# EAGLE board nakresy2 (EAGLE 7.2.0)
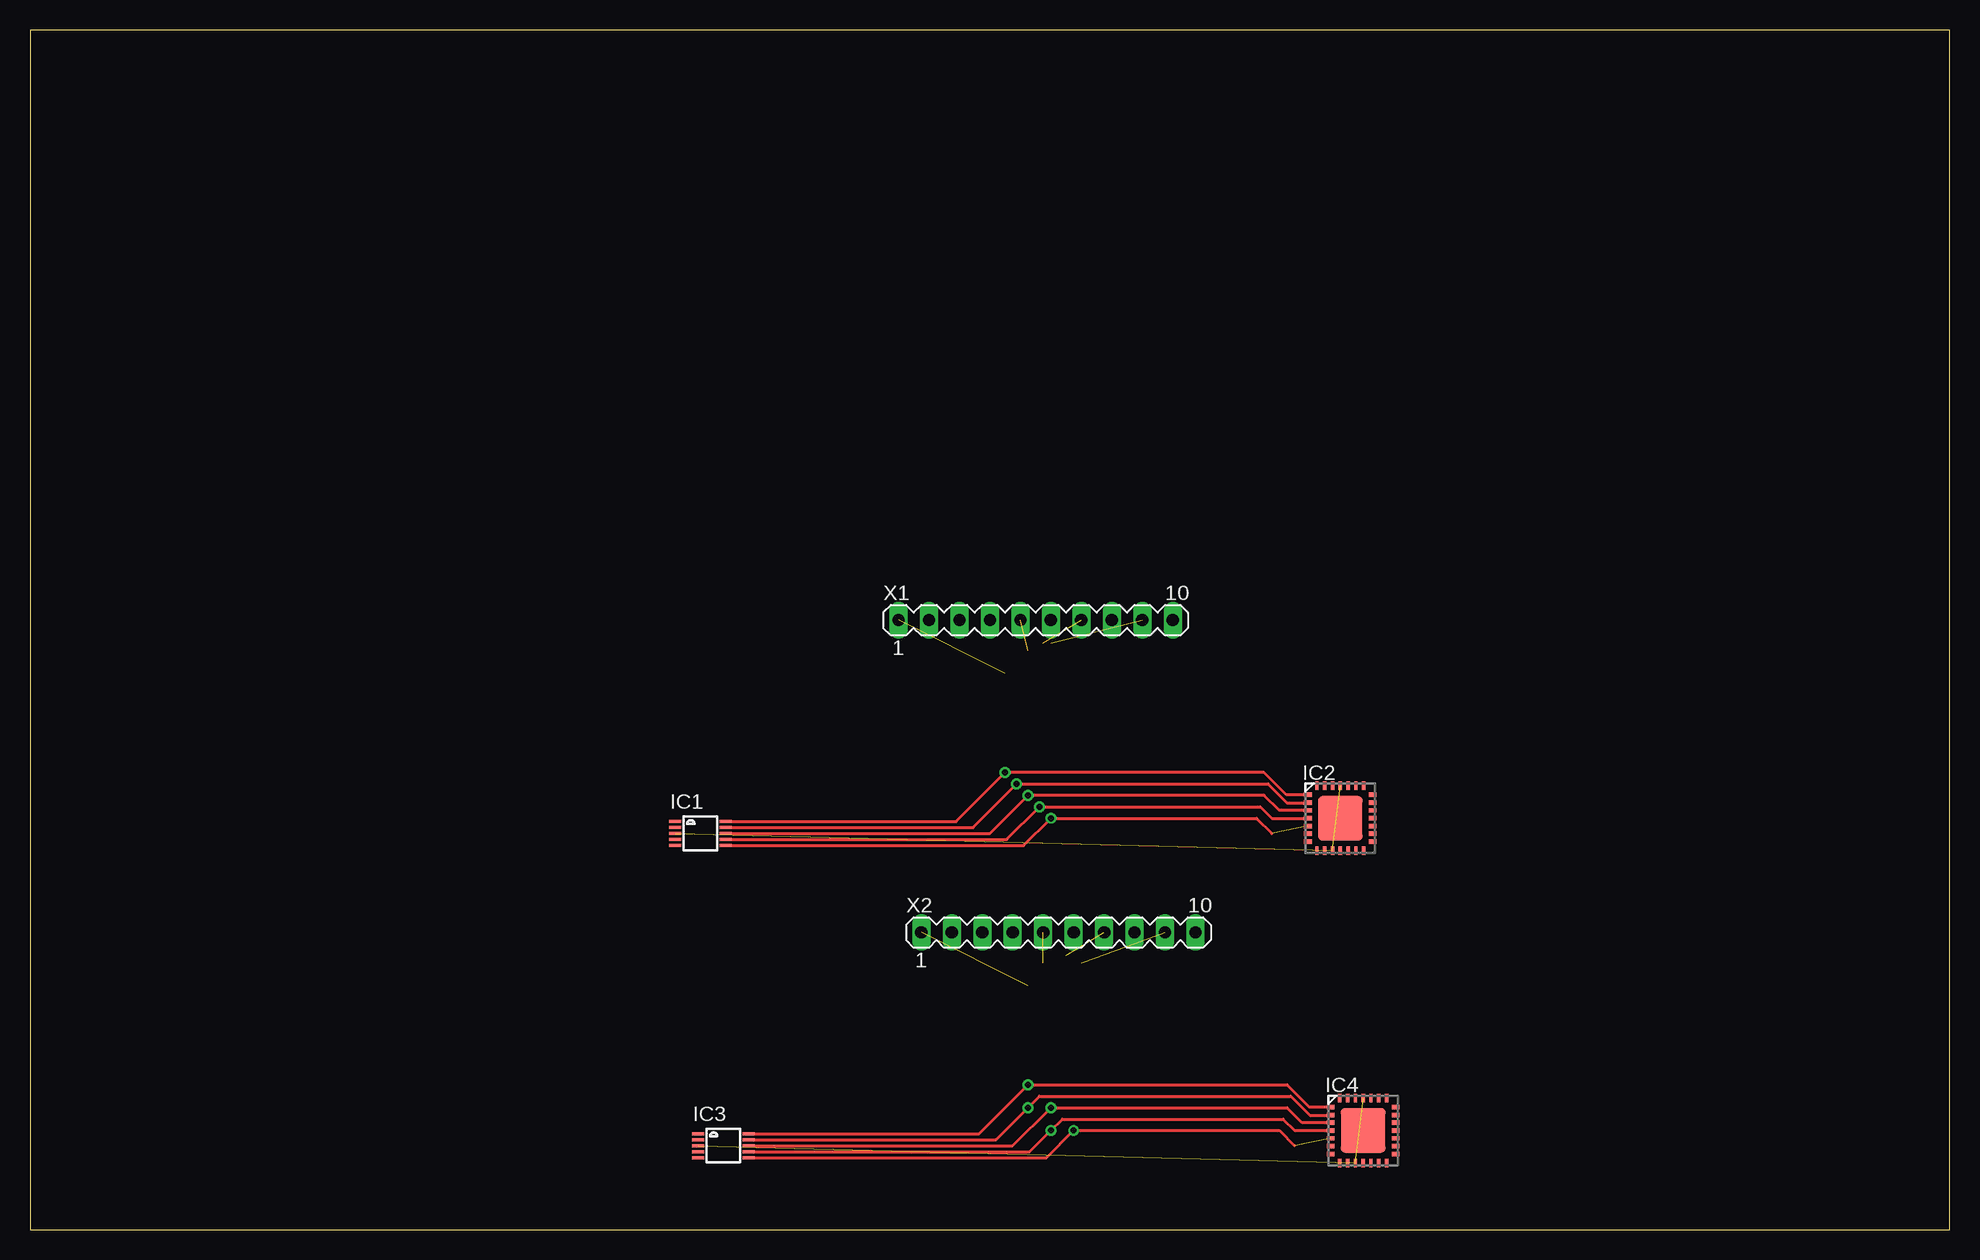
[diagram p0: board, top side]
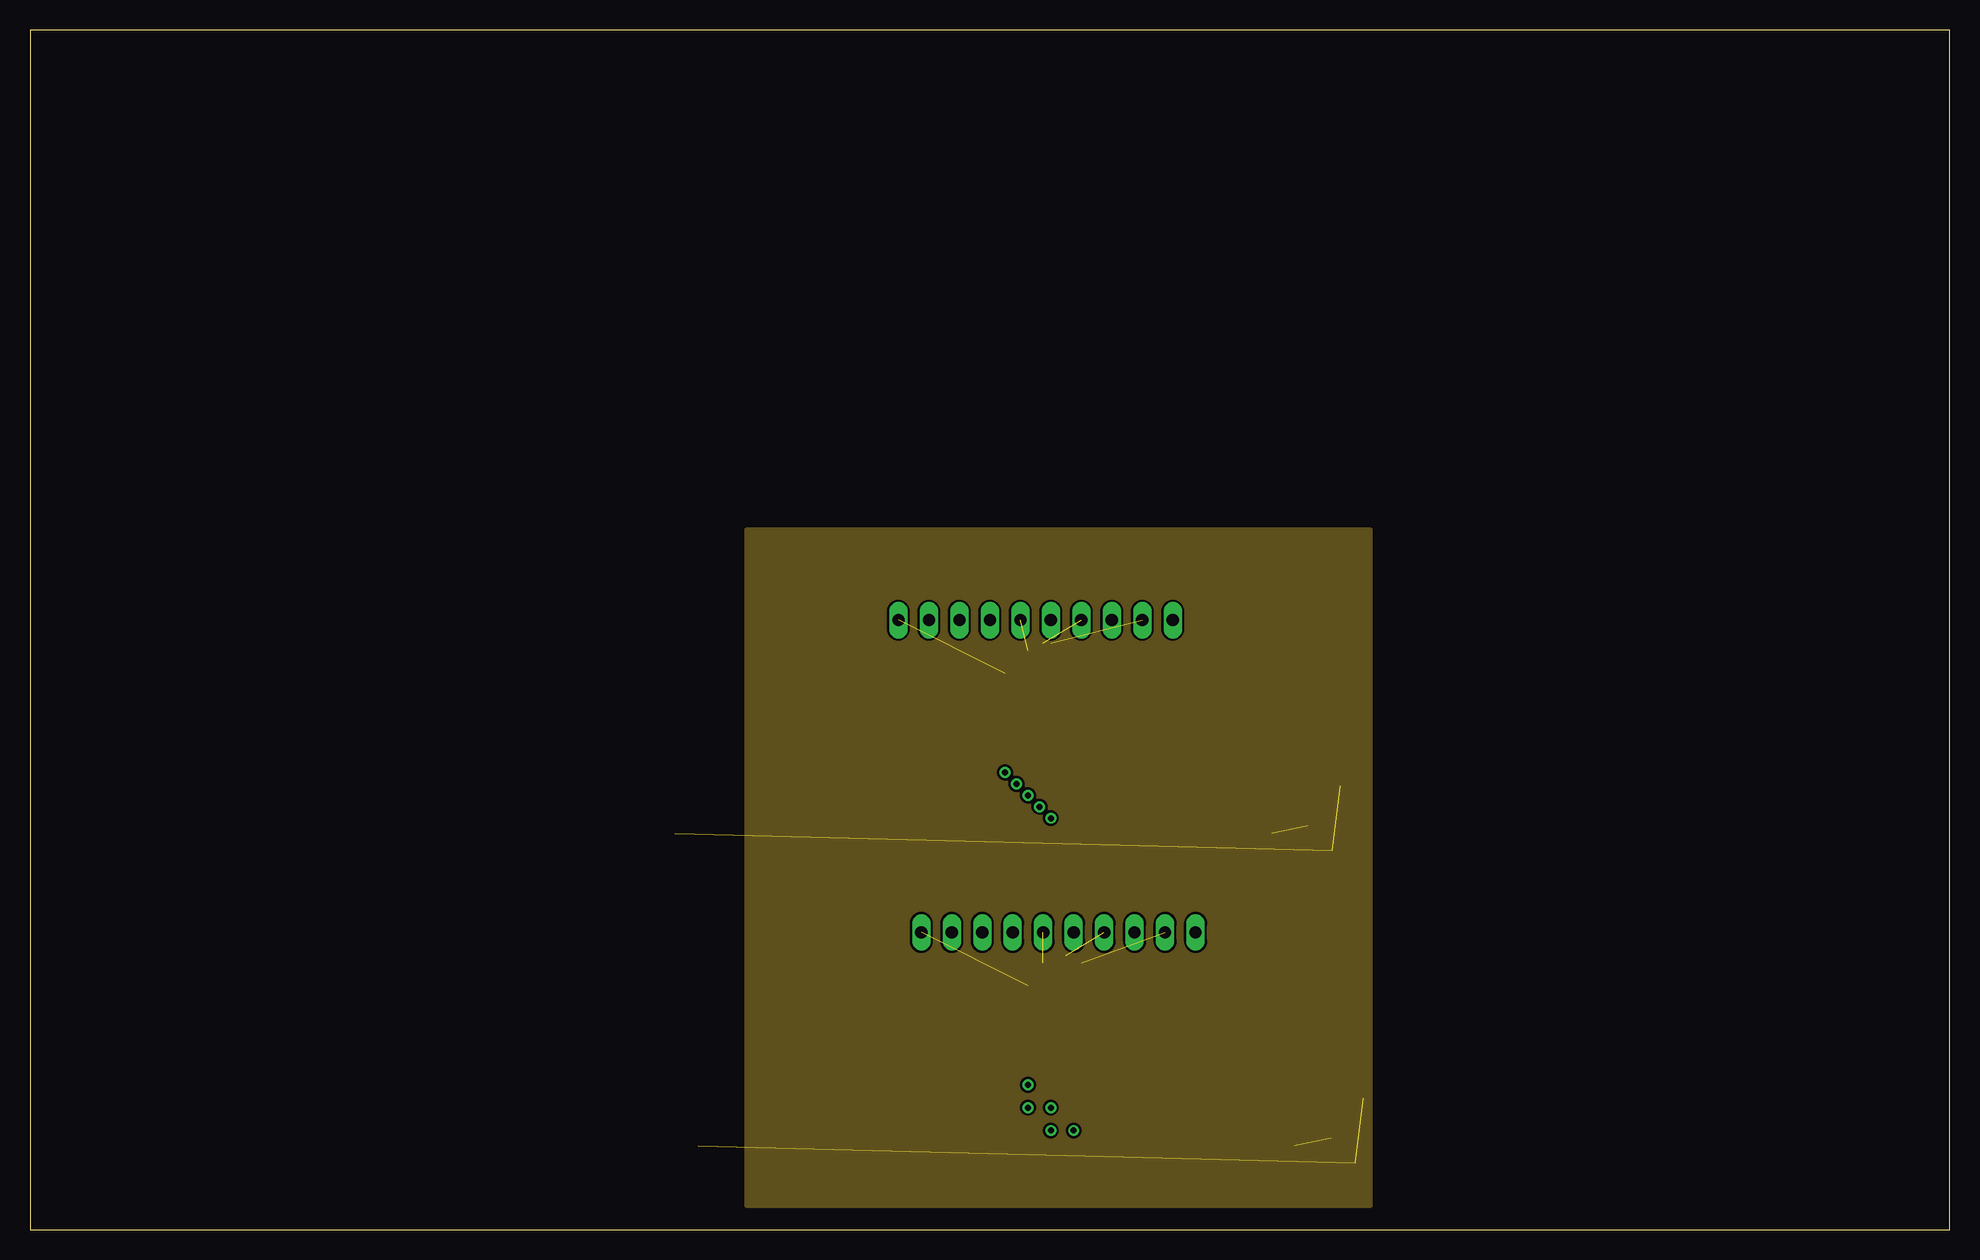
[diagram p1: board, inner layer Route2]
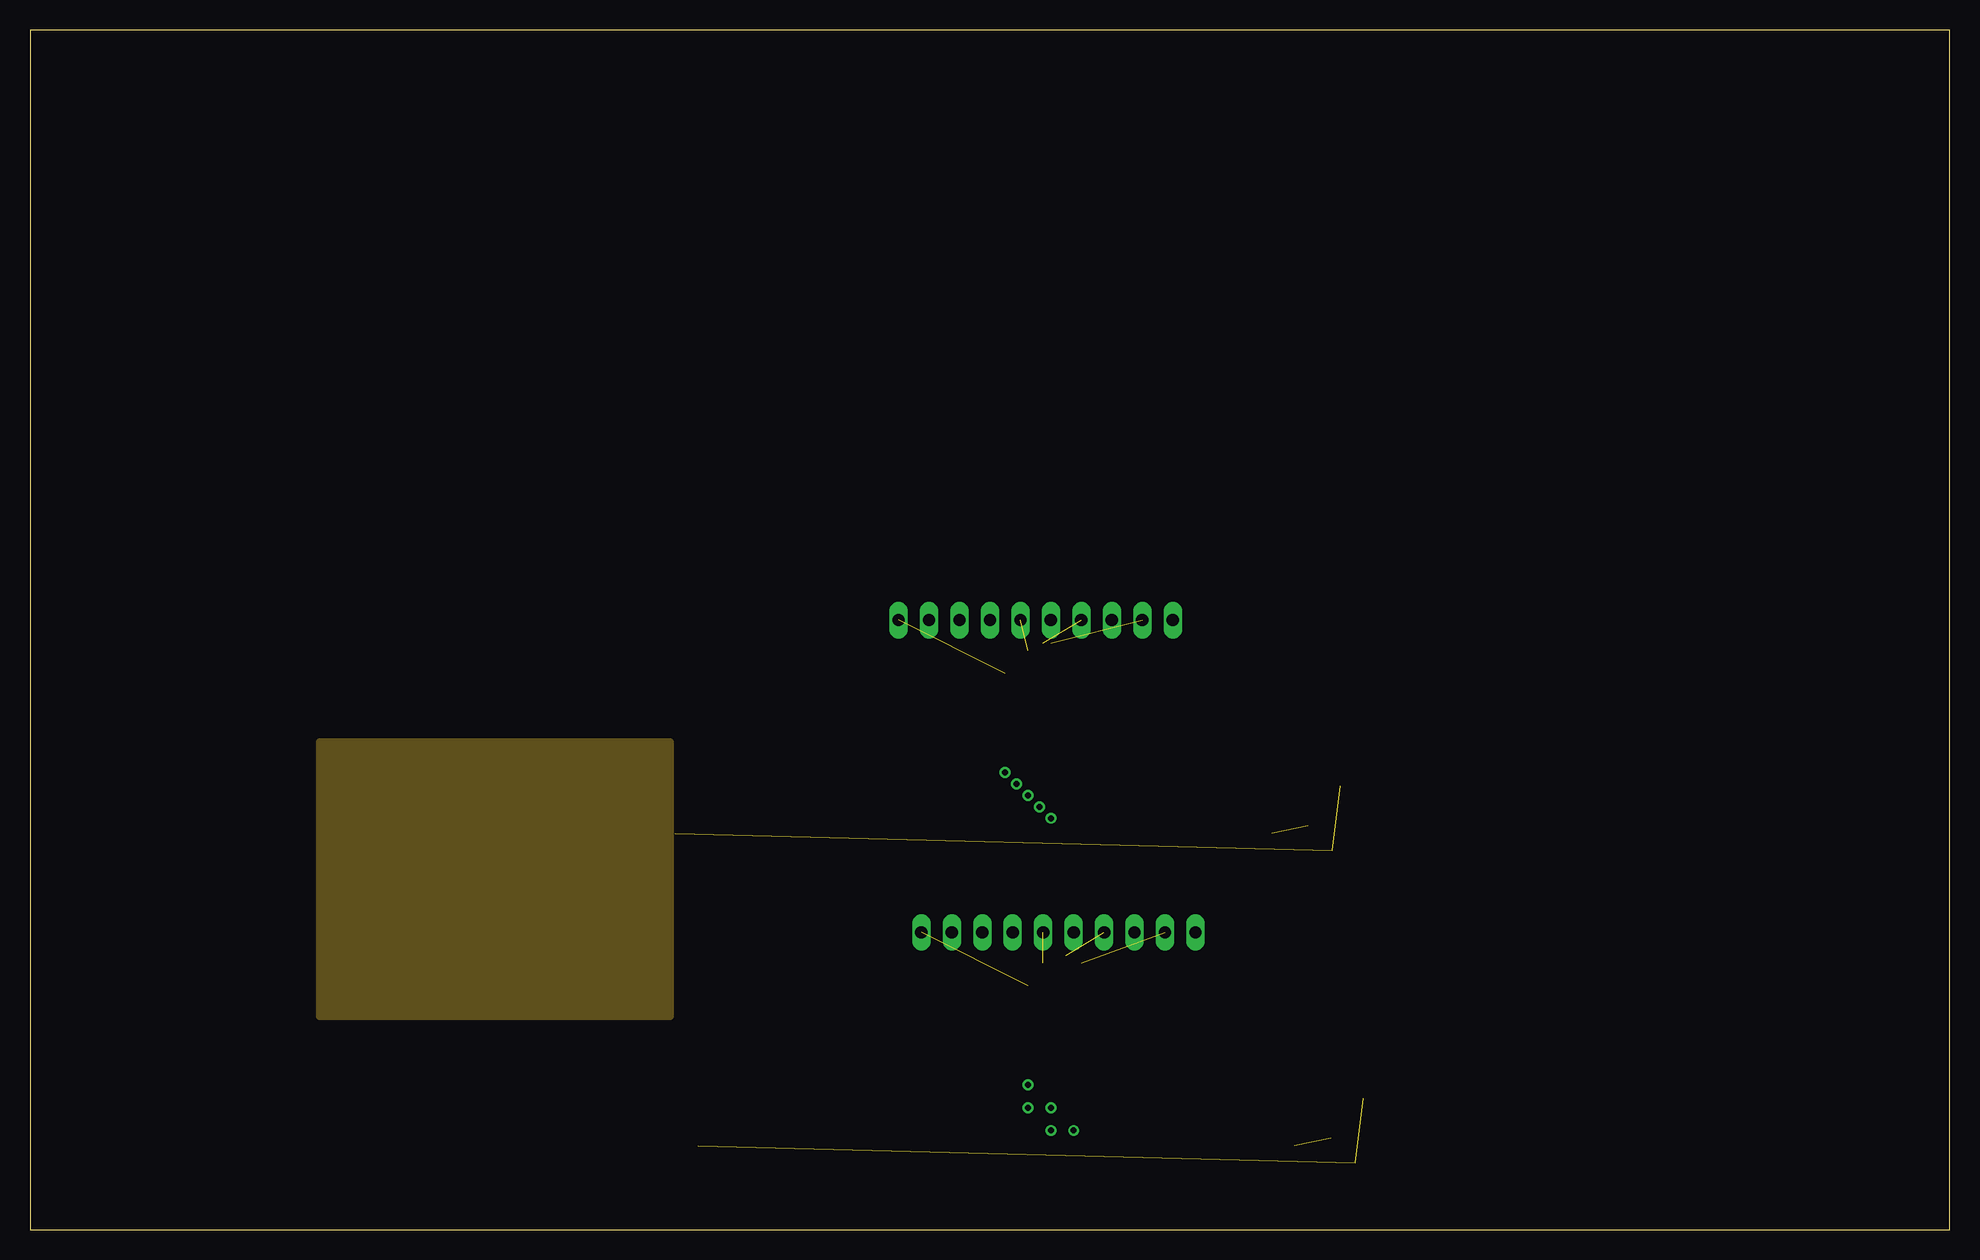
[diagram p2: board, inner layer Route3]
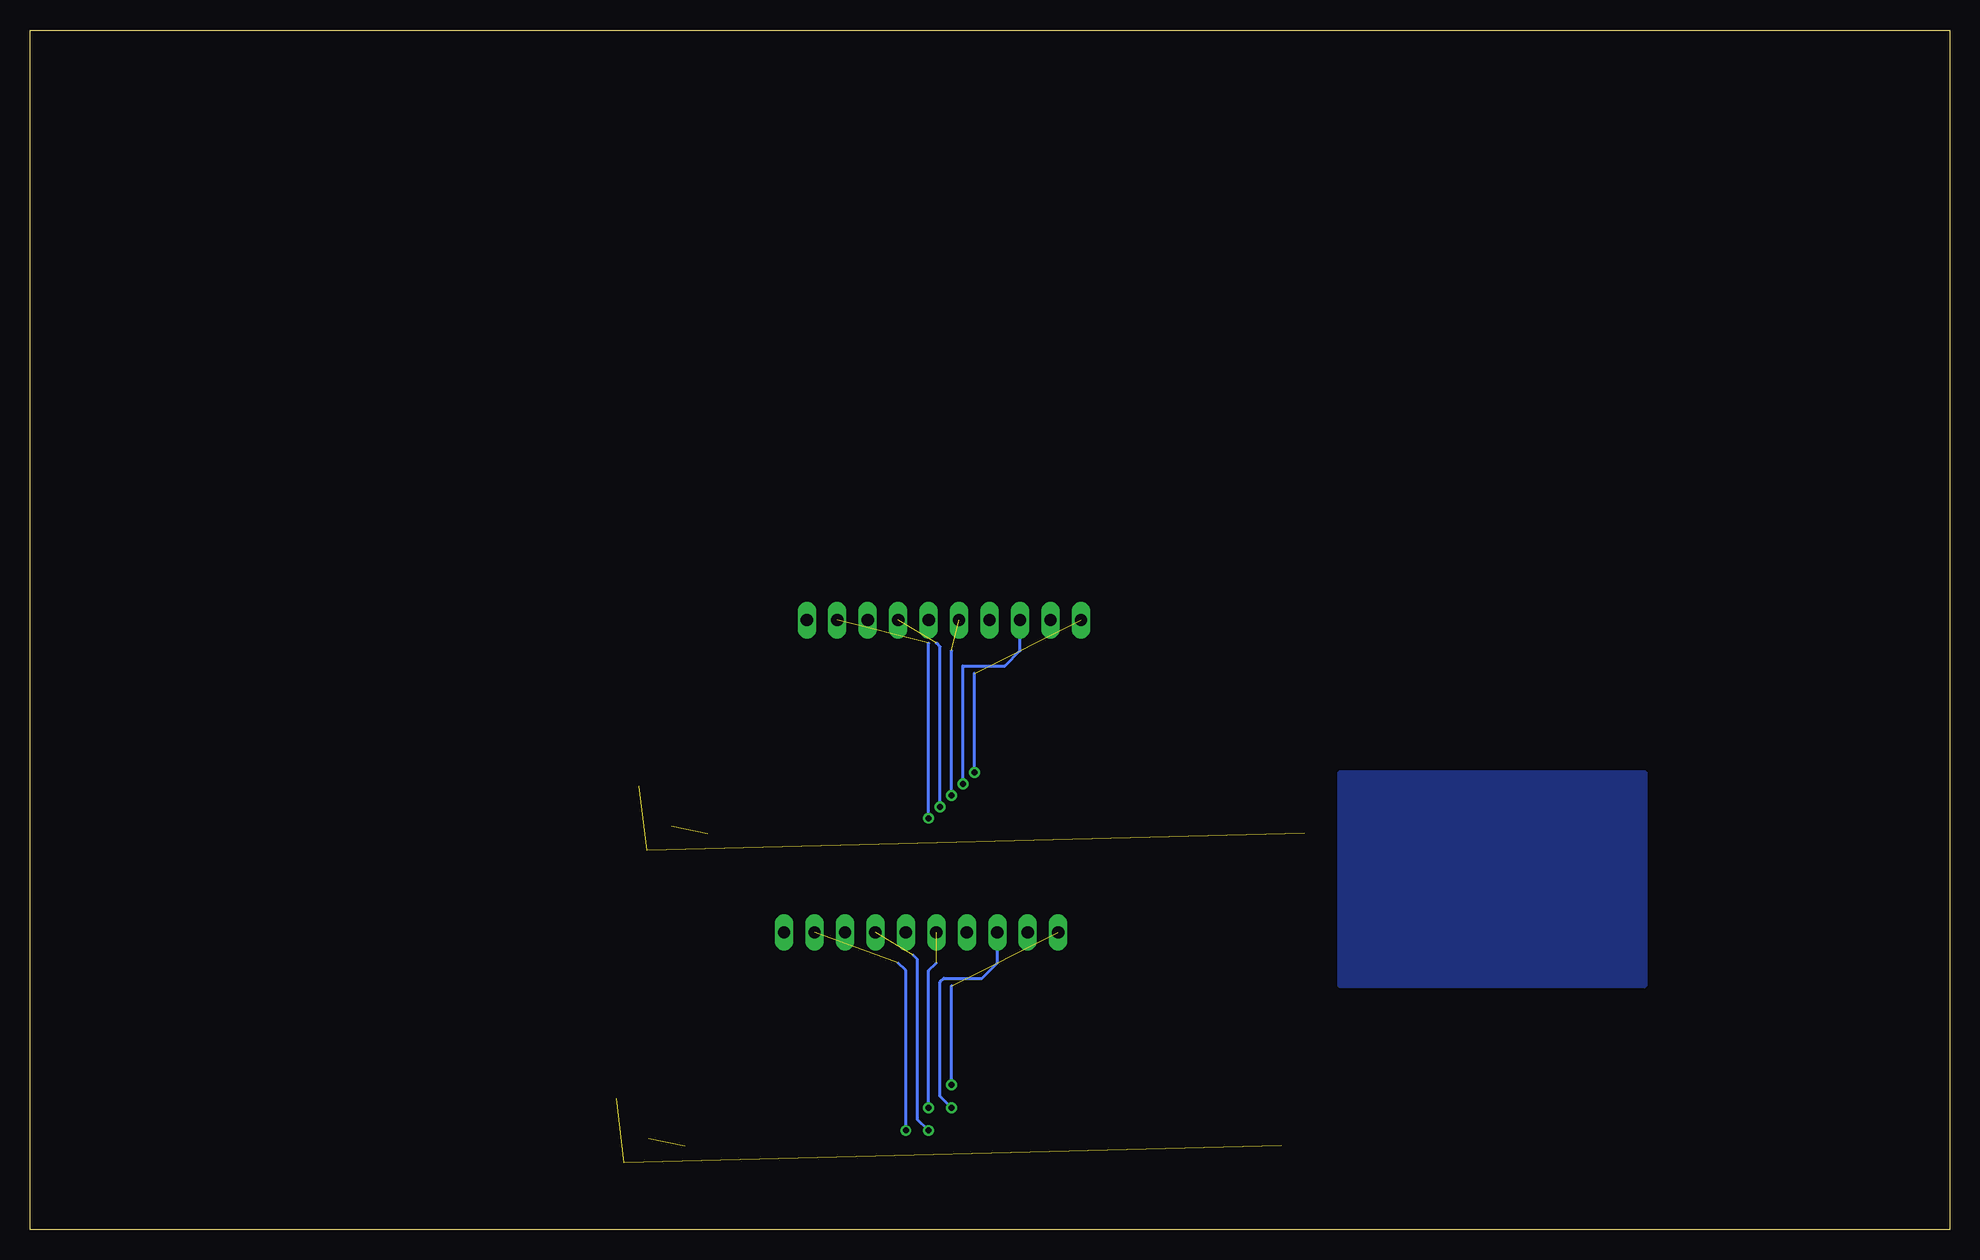
[diagram p3: board, bottom side, seen from below]

Size 160 x 100 mm. Coordinates in mm from the lower left corner, seen from the top.
Outline: 0,0 160,0 160,100 0,100 0,0
Copper layers (1*2*3*16): Top 0.035mm / dielectric 1.5mm / Route2 0.035mm / dielectric 0.15mm / Route3 0.035mm / dielectric 0.2mm / Bottom 0.035mm
Design rules "default *": minimum track width 10mil, minimum drill 24mil, track to track 8mil, track to pad 8mil, pad to pad 8mil, via to via 8mil, smd to smd 8mil, copper to edge 40mil, drill to drill 8mil, minimum pad ring 10mil, minimum via ring 8mil, stop-mask expansion 4mil, vias tented up to drill 0mil, thermal gap 10mil

## Footprints (pad centres in the part's own frame; a part is rotated, then mirrored left to right if it is on the bottom)
MSOP10 = smd 0.25 x 1: 1 -1,-2.113; 2 -0.5,-2.113; 3 0,-2.113; 4 0.5,-2.113; 5 1,-2.113; 6 1,2.113; 7 0.5,2.113; 8 0,2.113; 9 -0.5,2.113; 10 -1,2.113
QFN28-ML_6X6MM = smd 0.7 x 0.35: 1 -2.7,1.95; 2 -2.7,1.3; 3 -2.7,0.65; 4 -2.7,0; 5 -2.7,-0.65; 6 -2.7,-1.3; 7 -2.7,-1.95; 15 2.7,-1.95; 16 2.7,-1.3; 17 2.7,-0.65; 18 2.7,0; 19 2.7,0.65; 20 2.7,1.3; 21 2.7,1.95 | smd 0.35 x 0.7: 8 -1.95,-2.7; 9 -1.3,-2.7; 10 -0.65,-2.7; 11 0,-2.7; 12 0.65,-2.7; 13 1.3,-2.7; 14 1.95,-2.7; 22 1.95,2.7; 23 1.3,2.7; 24 0.65,2.7; 25 0,2.7; 26 -0.65,2.7; 27 -1.3,2.7; 28 -1.95,2.7 | smd 3.7 x 3.7: EXP 0,0
MA10-1 = drill 1.016 long: 1 -11.43,0; 2 -8.89,0; 3 -6.35,0; 4 -3.81,0; 5 -1.27,0; 6 1.27,0; 7 3.81,0; 8 6.35,0; 9 8.89,0; 10 11.43,0

## Placement (x,y rotation side)
IC1  AD7992  [MSOP10]  55.88,33.02 270 top
IC2  PIC24FJ32GA002_QFN  [QFN28-ML_6X6MM]  109.22,34.29 0 top
IC3  AD7992  [MSOP10]  57.78,6.99 270 top
IC4  PIC24FJ32GA002_QFN  [QFN28-ML_6X6MM]  111.12,8.26 0 top
X1  [MA10-1]  83.82,50.8 0 top
X2  [MA10-1]  85.72,24.77 0 top

## Library data of the parts
IC1 IC3 = analog-devices; MPN: AD7992BRMZ-0; OC_FARNELL: 1078311; OC_NEWARK: 31M4422
IC2 IC4 = microchip; MPN: PIC24FJ32GA002-I/ML; OC_FARNELL: unknown; OC_NEWARK: 88K6121
X1 X2 = con-lstb

## Nets
AGND: IC1.2
AGND1: IC3.2
N$2: IC1.10 IC2.1 X1.1
N$3: IC1.9 IC2.2 X1.3
N$4: IC1.8 IC2.3 X1.5
N$5: IC1.7 IC2.4 X1.7
N$6: IC1.6 IC2.5 X1.9
N$7: IC3.10 IC4.1 X2.1
N$8: IC3.9 IC4.2 X2.3
N$9: IC3.8 IC4.3 X2.5
N$10: IC3.7 IC4.4 X2.7
N$11: IC3.6 IC4.5 X2.9
VDD: IC1.3 IC2.10 IC2.25
VDD1: IC3.3 IC4.10 IC4.25
VDDCORE: IC2.17
VDDCORE1: IC4.17
VSS: IC2.24
VSS1: IC4.24

## Tracks (layer width: path | path; a pad name or v marks a point on that pad's centre or on a via)
GND
  pour Bottom: 25.4,38.1 25.4,20.32 50.8,20.32 50.8,38.1
N$2  (via drill 0.5)  (1 unrouted)
  Top 0.254: IC1.10 77.2,34.02 v81.28,38.1 102.87,38.1 104.73,36.24 IC2.1
  Bottom 0.254: v81.28,38.1 81.28,46.35
N$3  (via drill 0.5)
  Top 0.254: IC1.9 78.61,33.52 v82.23,37.15 103.19,37.15 104.78,35.56 106.49,35.56 IC2.2
  Bottom 0.254: v82.23,37.15 82.23,46.99 78.74,46.99 77.47,48.26 X1.3
N$4  (via drill 0.5)  (1 unrouted)
  Top 0.254: IC1.8 80.01,33.02 v83.19,36.2 102.87,36.2 104.12,34.94 IC2.3
  Bottom 0.254: v83.19,36.2 83.19,48.26
N$5  (via drill 0.5)  (1 unrouted)
  Top 0.254: IC1.7 81.42,32.52 v84.14,35.24 102.55,35.24 103.5,34.29 IC2.4
  Bottom 0.254: v84.14,35.24 84.14,48.58 84.45,48.9
N$6  (via drill 0.5)  (2 unrouted)
  Top 0.254: IC1.6 82.82,32.02 v85.09,34.29 102.23,34.29 103.5,33.02
  Bottom 0.254: v85.09,34.29 85.09,48.9
N$7  (via drill 0.5)  (1 unrouted)
  Top 0.254: IC3.10 79.11,7.99 v83.19,12.06 104.78,12.06 106.64,10.21 IC4.1
  Bottom 0.254: v83.19,12.06 83.19,20.32
N$8  (via drill 0.5)
  Top 0.254: IC3.9 80.51,7.49 v83.19,10.16 84.14,11.11 105.09,11.11 106.68,9.53 108.39,9.53 IC4.2
  Bottom 0.254: X2.3 79.38,22.23 80.64,20.95 83.82,20.95 84.14,20.64 84.14,11.11 v83.19,10.16
N$9  (via drill 0.5)  (1 unrouted)
  Top 0.254: IC3.8 81.92,6.99 v85.09,10.16 104.78,10.16 106.03,8.9 IC4.3
  Bottom 0.254: v85.09,10.16 85.09,21.59 84.45,22.23
N$10  (via drill 0.5)  (1 unrouted)
  Top 0.254: IC3.7 83.32,6.49 v85.09,8.26 86.04,9.21 104.46,9.21 105.41,8.26 IC4.4
  Bottom 0.254: 86.36,22.86 86.04,22.54 86.04,9.21 v85.09,8.26
N$11  (via drill 0.5)  (2 unrouted)
  Top 0.254: IC3.6 84.72,5.99 v87,8.26 104.14,8.26 105.41,6.99
  Bottom 0.254: v87,8.26 87,21.59 87.63,22.23
S$1
  pour Route2: 111.76,1.91 59.69,1.91 59.69,58.42 111.76,58.42
VDD  (2 unrouted)
  pour Route3: 24.13,40.64 24.13,17.78 53.34,17.78 53.34,40.64
VDD1  (2 unrouted)